# EAGLE board beercooler (EAGLE 6.4)

Size 100 x 80 mm. Coordinates in mm from the lower left corner, seen from the top.
Outline: 0,0 100,0 100,80 0,80 0,0
Copper layers (1*16): Top 0.035mm / dielectric 1.5mm / Bottom 0.035mm
Design rules "default": minimum track width 10mil, minimum drill 24mil, track to track 8mil, track to pad 8mil, pad to pad 8mil, via to via 8mil, smd to smd 8mil, copper to edge 40mil, drill to drill 8mil, minimum pad ring 10mil, minimum via ring 8mil, stop-mask expansion 4mil, vias tented up to drill 0mil, thermal gap 10mil

## Footprints (pad centres in the part's own frame; a part is rotated, then mirrored left to right if it is on the bottom)
AXIAL-0.4 = drill 0.9 pad 1.88: P$1 -5.08,0; P$2 5.08,0
SWITCH-SPST-SMD-A = smd 0.7 x 1.5: 1 -2.25,-1.75; 2 -0.75,-1.75; 3 2.25,-1.75 | smd 1 x 0.6: GND1 -3.65,1; GND3 3.65,1 | smd 1 x 0.8: GND2 -3.65,-1.1; GND4 3.65,-1.1 | hole 0.9: -1.5,0; 1.5,0
TACTILE-PTH = drill 1.016 pad 1.88: 1 -3.251,2.261; 2 3.251,2.261; 3 -3.251,-2.261; 4 3.251,-2.261
DUEMILANOVE_SHIELD = drill 1.016 pad 1.88: 3.3V 50.8,26.67; 5V 50.8,29.21; A0 50.8,41.91; A1 50.8,44.45; A2 50.8,46.99; A3 50.8,49.53; A4 50.8,52.07; A5 50.8,54.61; AREF 2.54,15.24; D2 2.54,49.53; D3 2.54,46.99; D4 2.54,44.45; D5 2.54,41.91; D6 2.54,39.37; D7 2.54,36.83; D8 2.54,33.02; D9 2.54,30.48; D10 2.54,27.94; D11 2.54,25.4; D12 2.54,22.86; D13 2.54,20.32; GND@0 50.8,31.75; GND@1 50.8,34.29; GND@2 2.54,17.78; RES 50.8,24.13; RX 2.54,54.61; TX 2.54,52.07; VIN 50.8,36.83 | hole 3.302: 45.72,57.15; 2.54,6.35
7-SEGMENT-1"PTH = drill 1 pad 1.88: 1 -5.08,-10.16; 2 -2.54,-10.16; 3 0,-10.16; 4 2.54,-10.16; 5 5.08,-10.16; 6 5.08,10.16; 7 2.54,10.16; 8 0,10.16; 9 -2.54,10.16; 10 -5.08,10.16
TO-92 = drill 0.813 pad 1.88: 1 -1.27,0; 2 0,1.905; 3 1.27,0

## Placement (x,y rotation side)
R1  [AXIAL-0.4]  52.07,41.91 0 top
R2  [AXIAL-0.4]  52.07,44.45 0 top
R3  [AXIAL-0.4]  52.07,49.53 0 top
R4  [AXIAL-0.4]  52.07,53.34 0 top
R5  [AXIAL-0.4]  52.07,55.88 0 top
R6  [AXIAL-0.4]  52.07,39.37 0 top
R7  [AXIAL-0.4]  52.07,36.83 0 top
R8  [AXIAL-0.4]  52.07,46.99 0 top
R9  [AXIAL-0.4]  60.96,64.77 180 top
R10  [AXIAL-0.4]  60.96,69.85 180 top
R11  [AXIAL-0.4]  55.88,26.67 180 top
S1  [SWITCH-SPST-SMD-A]  72.39,22.86 0 top
S2  [TACTILE-PTH]  72.39,63.5 0 top
S3  [TACTILE-PTH]  72.39,71.12 0 top
U1  ARDUINO_SHIELDLABEL  [DUEMILANOVE_SHIELD]  38.1,16.51 0 top
U$1  7-SEGMENT-DISPLAY-1"-RED  [7-SEGMENT-1"PTH]  72.39,44.45 0 top
U$2  TEMPERATURE-SENSOR  [TO-92]  49.53,19.05 0 top

## Library data of the parts
R1-R11 = SparkFun-Resistors
S1-S3 = SparkFun-Electromechanical
U1 = SparkFun-Boards
U$1 = SparkFun-Displays
U$2 = SparkFun-Sensors

## Nets
3.3V: U1.GND@2 U$2.1
5V: R11.P$1 S1.2 S2.1 S3.1 U1.5V U$2.3
N$1: R1.P$2 U$1.7
N$2: R2.P$2 U$1.6
N$3: R3.P$2 U$1.4
N$4: R4.P$2 U$1.2
N$5: R5.P$2 U$1.1
N$6: R6.P$2 U$1.9
N$7: R7.P$2 U$1.10
N$8: R8.P$2 U$1.5
N$9: R5.P$1 U1.D6
N$10: R4.P$1 U1.D7
N$11: R3.P$1 U1.D8
N$12: R8.P$1 U1.D9
N$13: R2.P$1 U1.D10
N$14: R1.P$1 U1.D11
N$15: R6.P$1 U1.D12
N$16: R7.P$1 U1.D13
N$17: R10.P$1 S3.3
N$18: R9.P$1 S2.3
N$19: R9.P$2 R10.P$2
N$20: S3.4 U1.D3
N$21: S2.4 U1.D4
N$22: S1.1 U$1.3
N$24: R11.P$2 U1.D2 U$2.2

## Tracks (layer width: path | path; a pad name or v marks a point on that pad's centre or on a via)
3.3V  (1 unrouted)
5V  (5 unrouted)
N$1  (1 unrouted)
N$2  (1 unrouted)
N$3  (1 unrouted)
N$4  (1 unrouted)
N$5  (1 unrouted)
N$6  (1 unrouted)
N$7  (1 unrouted)
N$8  (1 unrouted)
N$9  (1 unrouted)
N$10  (1 unrouted)
N$11  (1 unrouted)
N$12  (1 unrouted)
N$13  (1 unrouted)
N$14  (1 unrouted)
N$15  (1 unrouted)
N$16  (1 unrouted)
N$17  (1 unrouted)
N$18  (1 unrouted)
N$19  (1 unrouted)
N$20  (1 unrouted)
N$21  (1 unrouted)
N$22  (1 unrouted)
N$24  (2 unrouted)